# EAGLE board NewSensor (EAGLE 9.1.3)
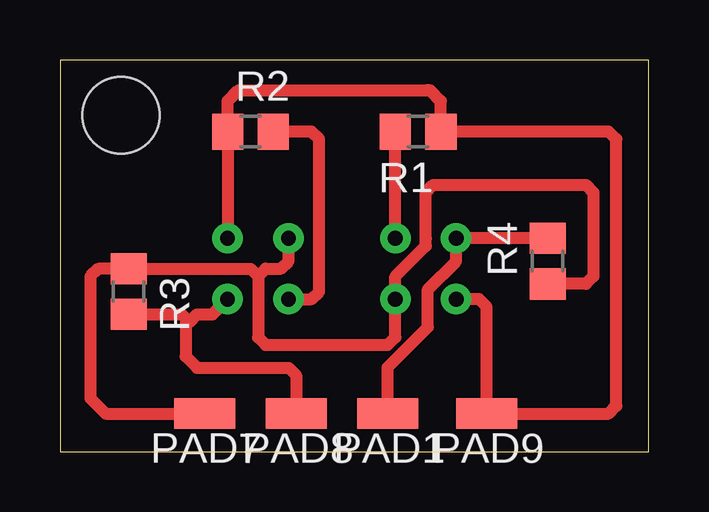
[diagram p0: board, top side]
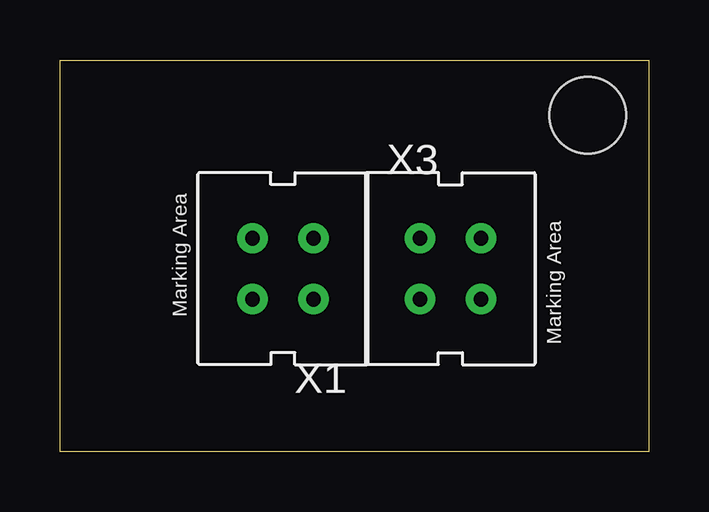
[diagram p1: board, bottom side, seen from below]

Size 24.52 x 16.32 mm. Coordinates in mm from the lower left corner, seen from the top.
Outline: 0,0 24.52,0 24.52,16.32 0,16.32 0,0
Copper layers (1*16): Top 0.035mm / dielectric 1.5mm / Bottom 0.035mm
Design rules "default": minimum track width 6mil, minimum drill 0.35mm, track to track 6mil, track to pad 6mil, pad to pad 6mil, via to via 6mil, smd to smd 6mil, copper to edge 40mil, drill to drill 6mil, minimum pad ring 10mil, minimum via ring 8mil, stop-mask expansion 4mil, vias tented up to drill 0mil, thermal gap 10mil
Holes 3.2 mm at 2.54,14.02

## Footprints (pad centres in the part's own frame; a part is rotated, then mirrored left to right if it is on the bottom)
SMD1,27-2,54 = smd 1.27 x 2.54: 1 0,0
RCL_R0805 = smd 1.3 x 1.5: 1 -0.95,0; 2 0.95,0
4 = drill 0.61 pad 1.27: A -1.27,1.27; C 1.27,-1.27; E 1.27,1.27; K -1.27,-1.27

## Placement (x,y rotation side)
PAD1  WIREPADSMD1,27-254  [SMD1,27-2,54]  13.65,1.59 90 top
PAD7  WIREPADSMD1,27-254  [SMD1,27-2,54]  6.03,1.59 90 top
PAD8  WIREPADSMD1,27-254  [SMD1,27-2,54]  9.84,1.59 90 top
PAD9  WIREPADSMD1,27-254  [SMD1,27-2,54]  17.78,1.59 90 top
R1  [RCL_R0805]  14.92,13.34 180 top
R2  [RCL_R0805]  7.94,13.34 0 top
R3  [RCL_R0805]  2.86,6.67 270 top
R4  [RCL_R0805]  20.32,7.94 90 top
X1  CNY70  [4]  15.24,7.62 180 bottom
X3  CNY70  [4]  8.26,7.62 0 bottom

## Library data of the parts
PAD1 PAD7-PAD9 = wirepad
R1-R4 = ScyllAlarmV3.0
X1 X3 = cny70

## Nets
GND_A: PAD9.1 R1.1 R2.1 X1.E X3.E
N$1: R1.2 X1.K
N$2: R2.2 X3.K
SENSOR_A: PAD8.1 R3.2 X3.C
SENSOR_B: PAD1.1 R4.2 X1.C
VCC_A: PAD7.1 R3.1 R4.1 X1.A X3.A

## Tracks (layer width: path | path; a pad name or v marks a point on that pad's centre or on a via)
GND_A
  Top 0.508: X3.E R2.1 6.99,14.61 7.43,15.05 15.43,15.05 | X1.E 17.46,6.35 17.78,6.03 PAD9.1 22.86,1.59 23.18,1.91 23.18,13.02 22.86,13.34 R1.1 15.87,14.61 15.43,15.05 | 15.43,15.05 15.24,15.05
N$1
  Top 0.508: X1.K R1.2
N$2
  Top 0.508: X3.K 10.48,6.35 10.79,6.67 10.79,13.02 10.48,13.34 R2.2
SENSOR_A
  Top 0.508: R3.2 5.08,5.72 5.24,5.56 | 5.24,5.56 5.4,5.4 5.71,5.71 6.35,5.71 X3.C | 5.24,5.56 5.24,3.97 5.71,3.49 9.52,3.49 9.84,3.17 PAD8.1
SENSOR_B
  Top 0.508: PAD1.1 13.65,3.51 15.33,5.19 15.33,6.76 16.51,7.94 X1.C R4.2
VCC_A
  Top 0.508: PAD7.1 1.9,1.59 1.27,2.22 1.27,7.3 1.59,7.62 R3.1 | R3.1 | R3.1 7.94,7.62 8.26,7.3 | 8.26,7.3 8.57,7.62 9.21,7.62 9.52,7.94 X3.A | 8.26,7.3 8.26,4.76 8.57,4.45 13.65,4.45 13.97,4.76 X1.A | X1.A 14.03,6.41 | 15.24,8.89 | 15.24,8.89 15.24,10.79 15.56,11.11 21.91,11.11 22.22,10.79 22.22,7.3 21.91,6.99 R4.1 | X1.A 13.97,7.3 15.24,8.57 15.24,8.89